# Altium PCB GPS_module.PcbDoc
Units mm, origin at the board's own origin, x right, y up, seen from the top; angles counter-clockwise.
Board outline 26.75 x 15 mm, 2 copper layers (Top Layer, Bottom Layer); 14 components, 14 nets, 70 pads, 23 vias.
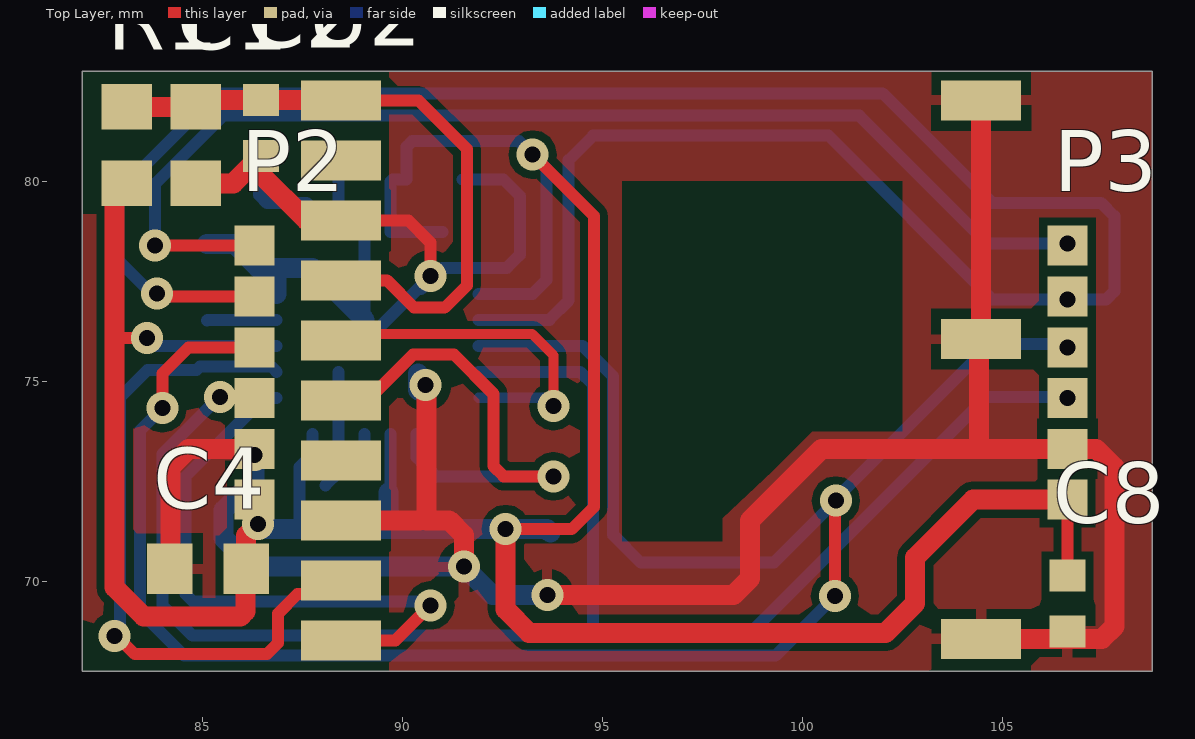
[diagram p0: Top Layer view]
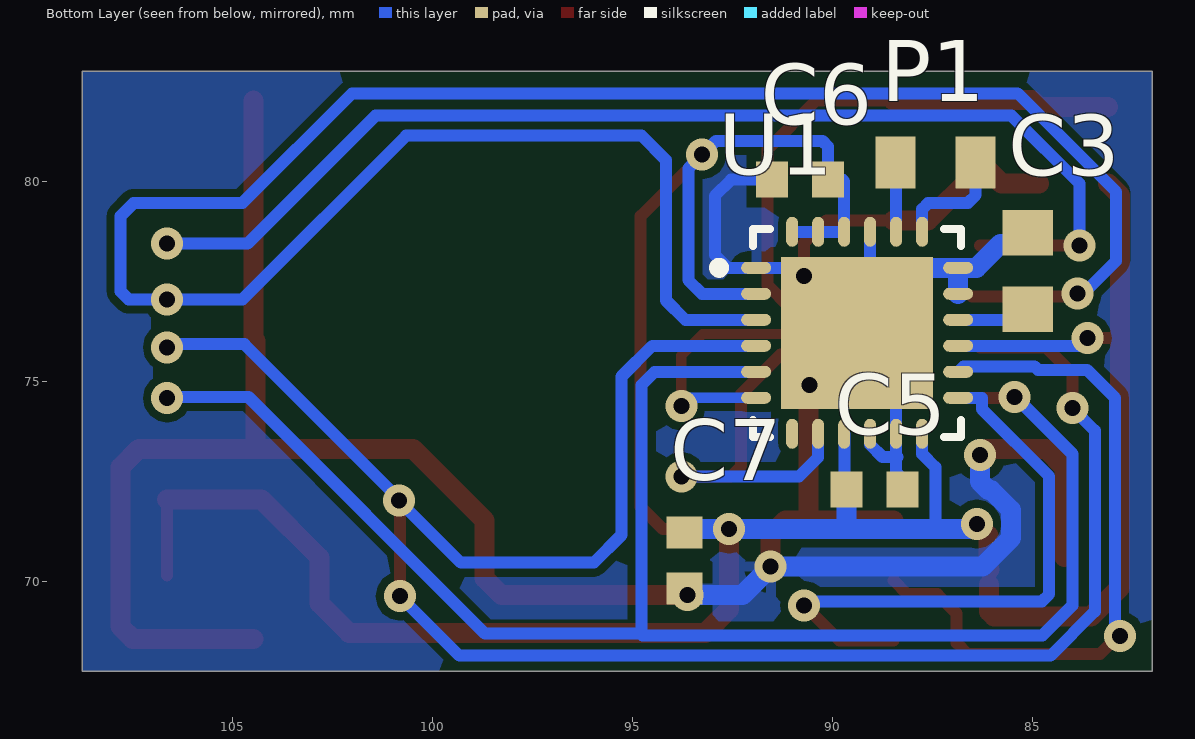
[diagram p1: Bottom Layer view, seen from below]

## Layer stack, top to bottom
Top Layer: signal copper 0.0356
Dielectric: core 0.32, FR-4, Dk 4.8
Bottom Layer: signal copper 0.0356

## Board outline
82,82.75 108.75,82.75 108.75,67.75 82,67.75

## Design rules (kind name [scope] priority, off if disabled: settings)
Clearance [All] p1: gap=0.203
HoleSize [All] p1: absolutevalues=TRUE maxlimit=4.826 minlimit=0.305 maxpercent=80.000 minpercent=20.000
MinimumSolderMaskSliver [All] p1: minsoldermaskwidth=0
PlaneConnect [All] p1: planeconnectstyle=Direct reliefexpansion=0.508 reliefentries=4 reliefconductorwidth=0.254 reliefairgap=0.254
PolygonConnect [All] p1: connectstyle=Relief reliefconductorwidth=0.254 reliefentries=4 polygonreliefangle="90 Angle" airgapwidth=0.254
RoutingVias [All] p1: holewidth=0.3 width=0.508 viastyle="Through Hole" minholewidth=0.3 minwidth=0.508 maxholewidth=5 maxwidth=5.334
SilkToSilkClearance [All] p1: silktosilkclearance=0
SilkToSolderMaskClearance [IsPad] p1: minsilkscreentomaskgap=0 clearancetoexposedcopper=TRUE
SolderMaskExpansion [All] p1: expansion=0.102
Width [All] p1: maxlimit=3 minlimit=0.203 preferedwidth=0.3
23 further rules are at their usual default settings.

## Components (designator, comment, footprint, x,y, rotation, side; value= is the part's Value field where it differs from the comment)
C1 "10u" 0805 84.836,80.899 r270 top
C2 "Cap Semi" 1608[0603] 86.462,81.331 r90 top
C3 "10u" 0805 85.115,77.749 r270 bottom
C4 "10u" 0805 85.141,70.307 r0 top
C5 "Cap Semi" 1608[0603] 88.951,72.288 r0 bottom
C6 "Cap Semi" 1608[0603] 90.805,80.035 r180 bottom
C7 "Cap Semi" 1608[0603] 93.701,70.51 r90 bottom
C8 "Cap Semi" 1608[0603] 106.629,69.444 r90 top
P1 "Programming" GeckoProgramming 88.417,80.467 r180 bottom
P2 "InputConn" Goldpin_1.27mm 86.309,75.844 r0 top
P3 "OutputConn" Goldpin_1.27mm 106.629,75.844 r0 top
R1 "Res2" 0805 83.109,80.899 r90 top
U1 "EFM32ZG110" QFN24_5x5_0.65 89.332,76.2 r180 bottom
U2 "FGPMMOPA6C" FGPMMOPA6C 88.468,82.017 r0 top

## Footprints (in the part's own frame and the unit in brackets; to place one, negate y for a bottom-side part, rotate by r counter-clockwise, add the part's x,y. Pads: shape width x height; smd on the part's side, far side on the other; paste and mask are expansions set on the pad)
0805 [mm]
  rect 1.14x1.27 smd: 1(-0.955,0) 2(0.955,0)
1608[0603] [mm] "Chip Capacitor, Body 1.6x0.8mm, IPC High Density"
  rect 0.8x0.9 smd: 1(-0.7,0) 2(0.7,0)
  body extent -0.87,-0.48 0.87,0.48, height 1.3
FGPMMOPA6C [mm]
  rect 2x1 smd: 1(0,0) 2(0,-1.5) 3(0,-3) 4(0,-4.5) 5(0,-6) 6(0,-7.5) 7(0,-9) 8(0,-10.5) 9(0,-12) 10(0,-13.5) 11(16.002,-13.462) 12(16.002,-5.969) 13(16.002,0)
GeckoProgramming [mm]
  rect 1x1.3 smd: 1(0,0) 2(2,0)
Goldpin_1.27mm [mm]
  rect 1x1 smd: 1(0,-3.81) 2(0,-2.54) 3(0,-1.27) 4(0,0) 5(0,1.27) 6(0,2.54)
QFN24_5x5_0.65 [mm]
  oval 0.75x0.3 smd: 1(-2.575,1.631) 2(-2.575,0.981) 3(-2.575,0.331) 4(-2.575,-0.319) 5(-2.575,-0.969) 6(-2.575,-1.619) 13(2.475,-1.619) 14(2.475,-0.969) 15(2.475,-0.319) 16(2.475,0.331) 17(2.475,0.981) 18(2.475,1.631)
  oval 0.3x0.75 smd: 7(-1.675,-2.519) 8(-1.025,-2.519) 9(-0.375,-2.519) 10(0.275,-2.519) 11(0.925,-2.519) 12(1.575,-2.519) 19(1.575,2.531) 20(0.925,2.531) 21(0.275,2.531) 22(-0.375,2.531) 23(-1.025,2.531) 24(-1.675,2.531)
  rect 3.8x3.8 smd: 25(-0.05,0.006)
  silkscreen extent -3.62,-2.59 2.55,2.61, body extent -2.63,-2.57 2.53,2.58, height 1

## Part data
C1 C3 C4: library part "Cap Semi", "Capacitor (Semiconductor SIM Model)"
C2 C5 C6 C7 C8: "Capacitor (Semiconductor SIM Model)"
P1: library part MHDR1X2, "Header, 2-Pin"
P2 P3: library part MHDR1X6, "Header, 6-Pin"
R1: "Resistor"

## Via types
v1: diameter 0.8, hole 0.4, Top Layer to Bottom Layer, 23 vias

## Nets (pads, with @x,y where several pads share a name; then routed paths per layer and width w, separated by ;. In a path a pad name is that pad's centre, name@x,y a point inside that pad or via, vN(x,y) a via of type N, cw(c..) or ccw(c..) an arc to the next point about the centre after c; other vN are vias at no path point)
1PPS: U1.8 U2.6 | length 12.3
  Top Layer w0.3: U2.6 88.653,74.701 89.308,74.701 90.264,75.658 91.296,75.658 92.278,74.676 92.278,72.873 92.532,72.619 v1(93.777,72.619)
  Bottom Layer w0.3: U1.8 90.357,73.092 90.83,72.619 v1(93.777,72.619)
3D-FIX: U1.6 U2.5 | length 8.9
  Top Layer w0.254: U2.5 88.626,76.175 93.243,76.175 93.777,75.641 v1(93.777,74.371)
  Bottom Layer w0.254: U1.6 93.592,74.581 93.624,74.549 93.777,74.549 v1(93.777,74.371)
+5V: P2.6 P3.6 | length 28.9
  Top Layer w0.3: v1(83.82,78.384) P2.6
  Bottom Layer w0.3: v1(83.82,78.384) 83.82,79.934 85.522,81.636 101.422,81.636 104.623,78.435 v1(106.629,78.435)
GND: C1.2 C2.1 C3.1 C4.1 C5.1 C6.1 C7.1 C8.1 P2.2 P3.2 U1.1 U1.10 U1.11 U1.17 U1.18 U1.21 U1.25 U2.3 U2.8 U2.11 U2.12 U2.13 | length 84.6
  Top Layer w0.3: U2.3 90.147,79.017 90.703,78.461 v1(90.703,77.622)
  Top Layer w0.5: C4.1@84.201,70.602 84.201,72.847 84.658,73.304 P2.2 v1(86.309,73.152) ; C1.2 85.775,79.944 C2.1 86.462,80.162 87.607,79.017 U2.3 ; U2.8 90.424,71.517 ; v1@90.602,74.574 90.602,71.517 91.17,71.517 91.542,71.145 v1(91.542,70.358) ; v1(93.624,69.647) 98.273,69.647 98.695,70.069 98.695,71.517 100.482,73.304 104.419,73.304 ; U2.11 107.493,68.555 107.798,68.859 107.798,72.847 107.34,73.304 P3.2 104.419,73.304 ; U2.13 U2.12 104.419,75.997 104.419,73.304
  Bottom Layer w0.3: C5.1@88.073,72.39 88.407,72.724 U1.11 U1.25@88.407,75.231 ; 88.367,73.101 88.748,73.101 89.057,73.41 U1.10 ; U1.21 89.057,76.531 U1.25@89.334,76.253 ; U1.25@89.382,76.301 v1(90.703,77.622) ; U1.25@90.471,77.296 91.007,77.831 U1.1 92.614,77.831 92.939,78.156 92.939,79.629 92.532,80.035 C6.1
  Bottom Layer w0.5: C3.1@85.115,78.425 85.801,78.425 86.395,77.831 U1.18 ; v1(86.309,73.152) 86.309,73.304 86.309,72.484 86.103,72.278 86.032,72.278 85.532,71.778 85.532,71.071 86.246,70.358 v1(91.542,70.358) 92.253,69.647 v1(93.624,69.647) ; U1.17 U1.18 ; U1.25@89.057,76.531 87.757,77.831 U1.18 ; U1.25@90.394,75.193 90.394,74.782 90.424,74.752 90.576,74.752 v1(90.576,74.905)
GPS_RX: U1.13 U2.10 | length 15
  Top Layer w0.3: U2.10 89.827,68.517 v1(90.703,69.393)
  Bottom Layer w0.3: U1.13 86.265,74.581 86.265,74.302 84.582,72.619 84.582,69.672 84.76,69.494 90.602,69.494 v1(90.703,69.393)
GPS_TX: U1.14 U2.9 | length 17.3
  Top Layer w0.3: v1@82.829,68.605 82.829,68.656 83.312,68.174 86.614,68.174 86.893,68.453 86.893,69.19 87.376,69.672 88.124,69.672 U2.9
  Bottom Layer w0.3: v1@82.829,68.605 v1@82.829,68.656 ; v1@82.936,68.712 82.936,74.579 83.634,75.278 84.855,75.278 84.945,75.368 86.72,75.368 U1.14
  other v1: 82.804,68.631
MODCONND0: P2.5 P3.5 U1.3 | length 56.5
  Top Layer w0.3: v1@83.718,77.191 v1(83.871,77.191) ; v1@83.845,77.114 P2.5@86.512,77.114
  Bottom Layer w0.3: v1(83.871,77.191) 83.718,77.191 82.906,78.003 82.906,79.731 85.369,82.194 102.006,82.194 104.75,79.451 107.467,79.451 107.798,79.121 107.798,77.241 107.594,77.038 v1(106.629,77.038) 104.75,77.038 100.655,81.132 94.767,81.132 94.158,80.523 94.158,77.013 93.676,76.531 U1.3
MODCONND1: P2.4 P3.4 U1.4 | length 51.6
  Top Layer w0.3: v1(83.998,74.32) 83.998,75.184 84.658,75.844 P2.4 ; v1(100.813,69.621) 100.813,72.034 100.838,72.06 v1(100.838,72.009) ; v1(106.629,75.844) P3.4@106.705,75.921
  Bottom Layer w0.3: v1(83.998,74.32) 83.439,73.762 83.439,69.24 84.543,68.136 99.328,68.136 v1(100.813,69.621) ; U1.4 94.503,75.881 95.271,75.113 95.271,71.15 95.961,70.46 99.289,70.46 v1(100.838,72.009) 100.838,72.06 104.699,75.921 106.705,75.921 v1(106.629,75.844)
MODCONND2: P2.3 P3.3 U1.5 | length 42.6
  Top Layer w0.3: v1(85.446,74.6) 85.446,74.803 85.446,74.625 85.395,74.574 P2.3 ; P3.3@106.578,74.625 106.426,74.625 106.477,74.574 v1(106.629,74.574)
  Bottom Layer w0.3: v1(85.446,74.6) 85.446,74.803 85.446,74.625 83.998,73.177 83.998,69.393 84.751,68.64 94.743,68.64 94.793,68.69 ; U1.5 94.441,75.231 94.767,74.905 94.767,68.715 94.793,68.69 ; v1(106.629,74.574) 106.477,74.574 106.426,74.625 106.401,74.6 104.597,74.6 98.687,68.69 94.793,68.69
NetC1_1: C1.1 C2.2 R1.2 U2.1 U2.4 | length 16.2
  Top Layer w0.3: U2.4 89.615,77.517 90.297,76.835 91.059,76.835 91.618,77.394 91.618,80.797 90.399,82.017 U2.1
  Top Layer w0.5: R1.2 C1.1 85.013,82.031 C2.2 88.454,82.031 U2.1
NetC3_2: C3.2 U1.16 | length 1.7
  Bottom Layer w0.3: C3.2@85.115,76.515 85.131,76.531 U1.16
NetP1_1: P1.1 U1.20 | length 1.7
  Bottom Layer w0.3: U1.20 88.407,80.457 P1.1
NetP1_2: P1.2 U1.19 | length 2.9
  Bottom Layer w0.3: P1.2 86.417,79.648 86.614,79.451 87.605,79.451 87.757,79.299 U1.19
VCC: C4.2 C5.2 C6.2 C7.2 C8.2 P2.1 P3.1 R1.1 U1.2 U1.9 U1.12 U1.15 U1.22 U1.23 U1.24 | length 76.2
  Top Layer w0.3: 83.042,76.073 v1(83.617,76.073) ; v1(92.583,71.298) 94.234,71.298 94.793,71.857 94.793,79.121 v1(93.256,80.658) ; C8.2 P3.1
  Top Layer w0.5: R1.1 82.804,79.639 82.804,69.843 83.53,69.117 85.958,69.117 86.081,69.24 C4.2@86.081,69.917 ; C4.2@86.071,70.283 C4.2 86.096,71.135 v1(86.385,71.425) ; v1(92.583,71.298) 92.583,69.291 93.167,68.707 102.083,68.707 102.819,69.444 102.819,70.587 104.267,72.034 P3.1
  Bottom Layer w0.3: v1(83.617,76.073) 83.819,75.871 86.847,75.871 U1.15 ; 87.427,71.298 87.427,72.847 87.757,73.177 U1.12 ; C5.2@89.702,72.39 U1.9@89.702,73.676 ; U1.24 U1.23 U1.22 89.707,79.993 89.749,80.035 C6.2 90.105,80.859 90.246,81.001 92.913,81.001 v1(93.256,80.658) 93.599,80.315 93.599,77.521 93.259,77.181 U1.2
  Bottom Layer w0.5: v1(86.385,71.425) 86.512,71.298 87.427,71.298 89.651,71.298 ; C5.2@89.651,72.212 89.651,71.298 ; C7.2 93.613,71.298 v1(92.583,71.298) 89.651,71.298
pads on no net: U1.7 U2.2 U2.7

## Polygon pours and split planes (outlines as drawn)
GND on Top Layer "Top Layer-No Net" (solid, pour order 2): 82,82.75 108.75,82.75 108.75,67.75 82,67.75
GND on Bottom Layer "Top Layer-No Net" (solid, pour order 4): 82,82.75 108.75,82.75 108.75,67.75 82,67.75

## Other copper
Top Layer:
  pour cut-out: 95.5,80 102.5,80 102.5,73.75 100.25,73.75 99.25,72.75 98,71.574 98,71 95.5,71
Bottom Layer:
  pour cut-out: 95,80.5 100.5,80.5 104.5,76.5 99,71 95.806,71.322 95.5,73.5 95.5,75.5 94.5,76.5 94.5,78.5

## Dimensions
108.75,82.75 to 108.75,67.75 on Mechanical 1
82,82.75 to 108.75,82.75 on Mechanical 1